# EAGLE board BatteryMonitor (EAGLE 7.6.0)
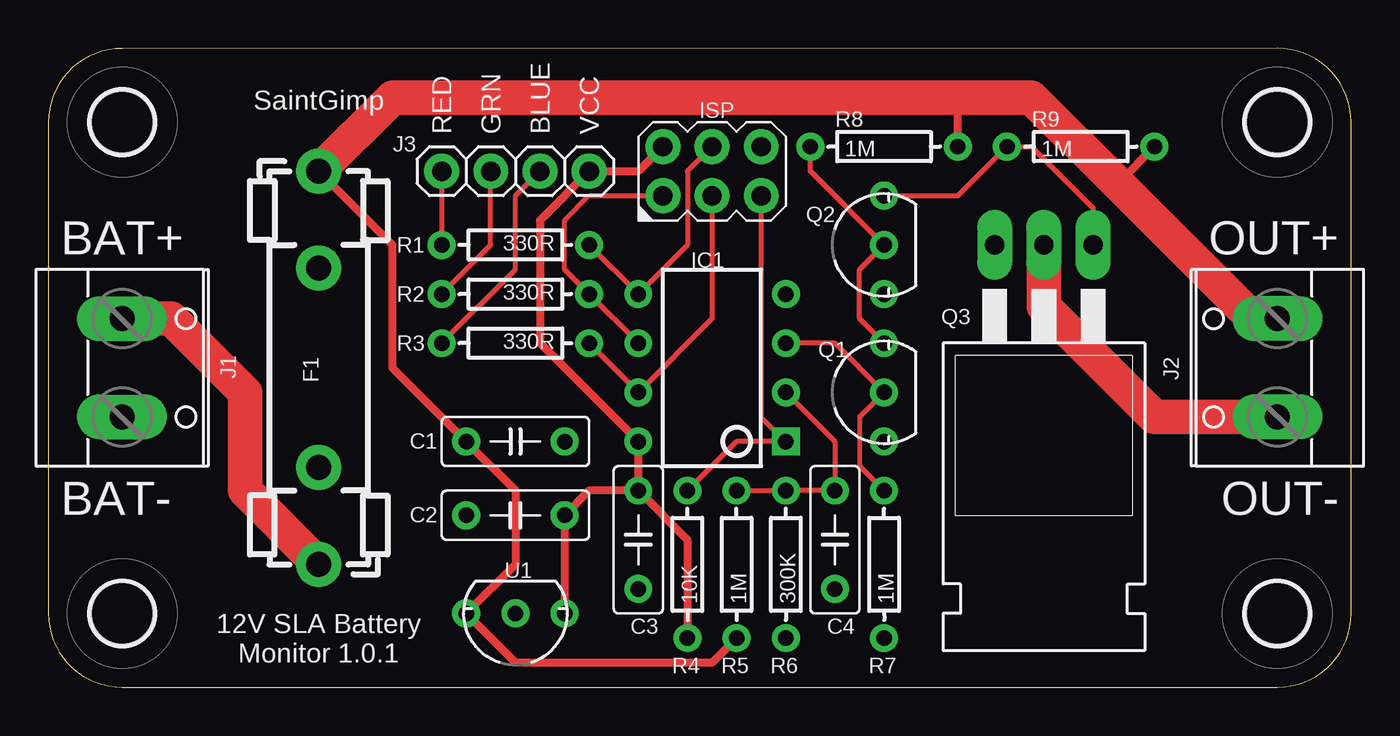
[diagram p0: board, top side]
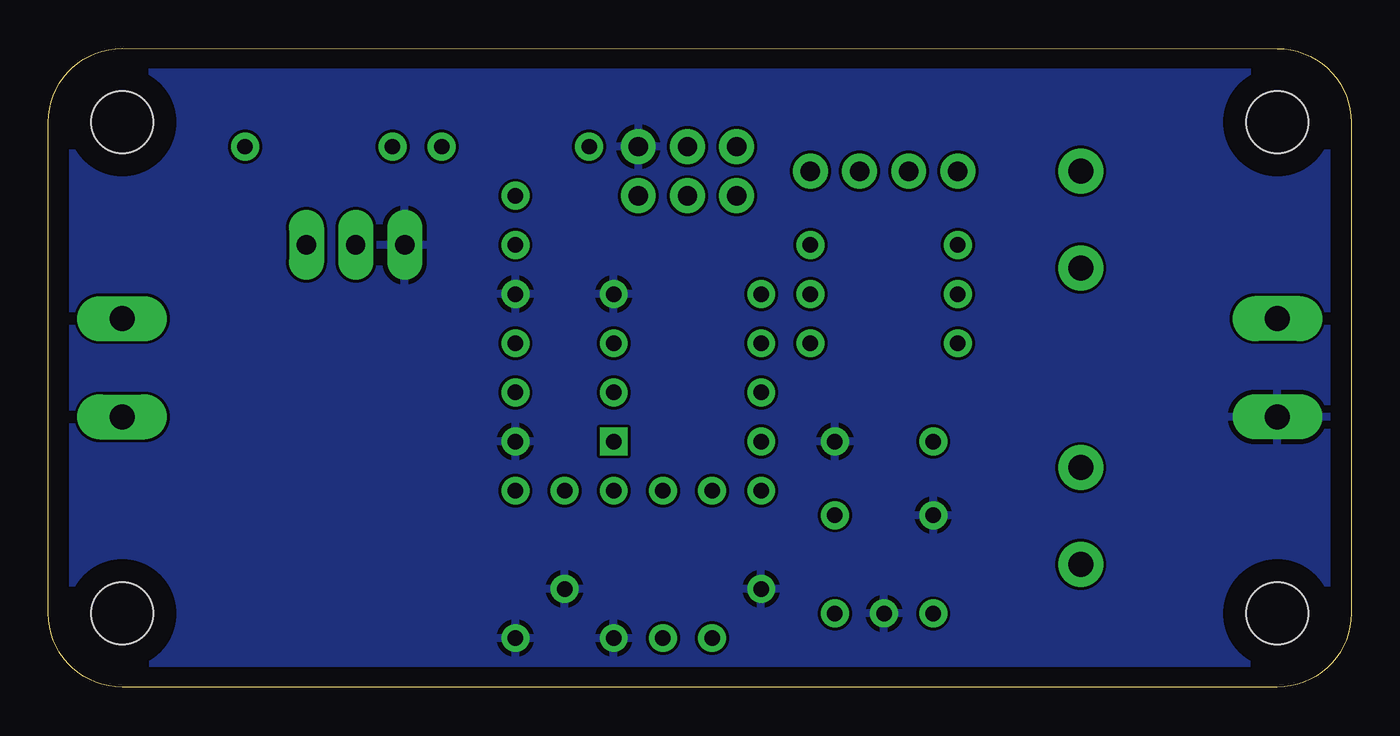
[diagram p1: board, bottom side, seen from below]

Size 67.31 x 33.02 mm. Coordinates in mm from the lower left corner, seen from the top.
Outline: 3.81,0 63.5,0 arc90 67.31,3.81 67.31,29.21 arc90 63.5,33.02 3.81,33.01 arc90 0,29.2 0,3.81 arc90 3.81,0
Copper layers (1*16): Top 0.0356mm / dielectric 1.5011mm / Bottom 0.0356mm
Design rules "Saintgimp-OSHPark": minimum track width 10mil, minimum drill 13mil, track to track 6mil, track to pad 6mil, pad to pad 6mil, via to via 6mil, smd to smd 6mil, copper to edge 15mil, drill to drill 6mil, minimum pad ring 12mil, minimum via ring 7mil, stop-mask expansion 2mil, vias tented up to drill 24mil, thermal gap 10mil

## Footprints (pad centres in the part's own frame; a part is rotated, then mirrored left to right if it is on the bottom)
CAPACITOR-5MM = drill 0.8: 1 -2.54,0; 2 2.54,0
FUSE_HOLDER_5X20MM = drill 1.3: 1 -10.16,0; 2 10.16,0; 3 -5.156,0; 5 5.156,0
DIP08 = drill 0.8 square: 1 -3.81,-3.81 | drill 0.8: 2 -1.27,-3.81; 3 1.27,-3.81; 4 3.81,-3.81; 5 3.81,3.81; 6 1.27,3.81; 7 -1.27,3.81; 8 -3.81,3.81
ICSP-HEADER = drill 1: 1 -1.27,2.54; 2 1.27,2.54; 3 -1.27,0; 4 1.27,0; 5 -1.27,-2.54; 6 1.27,-2.54
SCREW-TERM-2 = drill 1.3 long: 1 -2.54,0; 2 2.54,0
1X04 = drill 1: 1 -3.81,0; 2 -1.27,0; 3 1.27,0; 4 3.81,0
TO92-INLINE = drill 0.8: 1 -2.54,0; 2 0,0; 3 2.54,0
TO220BH-NO-HOLE = drill 1 long: P1 -2.54,-6.35; P2 0,-6.35; P3 2.54,-6.35
AXIAL-7.5MM = drill 0.8: P$1 -3.81,0; P$2 3.81,0
MOUNTING-HOLE-3.2MM = hole 3.2: 0,0

## Placement (x,y rotation side)
C1  1uF  [CAPACITOR-5MM]  24.13,12.7 0 top
C2  1uF  [CAPACITOR-5MM]  24.13,8.89 180 top
C3  1uF  [CAPACITOR-5MM]  30.48,7.62 270 top
C4  33nF  [CAPACITOR-5MM]  40.64,7.62 270 top
F1  4A  [FUSE_HOLDER_5X20MM]  13.97,16.51 90 top
IC1  ATTINY85-20PU  [DIP08]  34.29,16.51 90 top
ISP  ICSP-HEADER-6  [ICSP-HEADER]  34.29,26.67 90 top
J1  SCREW-TERM-2  [SCREW-TERM-2]  3.81,16.51 270 top
J2  SCREW-TERM-2  [SCREW-TERM-2]  63.5,16.51 90 top
J3  PINHD-1X4  [1X04]  24.13,26.67 0 top
Q1  2N7000G  [TO92-INLINE]  43.18,15.24 90 top
Q2  2N7000G  [TO92-INLINE]  43.18,22.86 90 top
Q3  IRLB8721PBF-H-NH  [TO220BH-NO-HOLE]  51.44,16.51 180 top
R1  330R  [AXIAL-7.5MM]  24.13,22.86 180 top
R2  330R  [AXIAL-7.5MM]  24.13,20.32 180 top
R3  330R  [AXIAL-7.5MM]  24.13,17.78 180 top
R4  10K  [AXIAL-7.5MM]  33.02,6.35 90 top
R5  1M  [AXIAL-7.5MM]  35.56,6.35 270 top
R6  300K  [AXIAL-7.5MM]  38.1,6.35 90 top
R7  1M  [AXIAL-7.5MM]  43.18,6.35 90 top
R8  1M  [AXIAL-7.5MM]  43.18,27.94 0 top
R9  1M  [AXIAL-7.5MM]  53.34,27.94 0 top
U1  LP2950  [TO92-INLINE]  24.13,3.81 180 top
U$1  [MOUNTING-HOLE-3.2MM]  3.81,3.81 90 top
U$2  [MOUNTING-HOLE-3.2MM]  3.81,29.21 0 top
U$3  [MOUNTING-HOLE-3.2MM]  63.5,29.21 0 top
U$4  [MOUNTING-HOLE-3.2MM]  63.5,3.81 0 top

## Library data of the parts
C1-C4 F1 IC1 ISP J1-J3 Q1-Q3 R1-R9 U1 U$1-U$4 = SaintGimp

## Nets
BAT: C1.1 F1.2 J2.2 R5.P$2 R8.P$2 R9.P$2 U1.3
BLUE: IC1.7 ISP.3 R3.P$1
GND: C1.2 C2.2 C3.2 C4.2 IC1.4 ISP.6 J1.2 Q1.1 Q2.1 Q3.P3 R6.P$1 R7.P$1 U1.2
GRN: IC1.6 ISP.1 R2.P$1
N$1: F1.1 J1.1
N$3: IC1.3 Q1.2 R7.P$2
N$4: J2.1 Q3.P2
N$5: C4.1 IC1.2 R5.P$1 R6.P$2
N$6: Q1.3 Q2.2 R8.P$1
N$7: Q2.3 Q3.P1 R9.P$1
N$8: J3.1 R1.P$2
N$9: J3.2 R2.P$2
N$10: J3.3 R3.P$2
RED: IC1.5 ISP.4 R1.P$1
RESET: IC1.1 ISP.5 R4.P$2
VCC: C2.1 C3.1 IC1.8 ISP.2 J3.4 R4.P$1 U1.1

## Tracks (layer width: path | path; a pad name or v marks a point on that pad's centre or on a via)
BAT
  Top 0.406: F1.2 17.78,22.86 17.78,16.51 C1.1 24.13,10.16 24.13,6.35 U1.3 24.13,1.27 34.29,1.27 R5.P$2 | R8.P$2 46.99,30.48 | R9.P$2 55.24,26.04
  Top 1.778: J2.2 62.23,19.05 55.24,26.04 50.8,30.48 46.99,30.48 17.78,30.48 F1.2
BLUE
  Top 0.254: ISP.3 34.29,19.05 IC1.7 R3.P$1
GND
  pour Bottom: 1.27,31.75 66.04,31.75 66.04,1.27 1.27,1.27
GRN
  Top 0.254: ISP.1 27.94,25.4 26.67,24.13 26.67,21.59 R2.P$1 IC1.6
N$1
  Top 1.778: J1.1 6.35,19.05 10.16,15.24 10.16,10.16 F1.1
N$3
  Top 0.254: R7.P$2 41.91,11.43 41.91,13.97 Q1.2 40.64,17.78 IC1.3
N$4
  Top 1.778: J2.1 57.15,13.97 51.44,19.68 Q3.P2
N$5
  Top 0.254: R5.P$1 R6.P$2 C4.1 40.64,12.7 IC1.2
N$6
  Top 0.254: Q1.3 41.91,19.05 41.91,21.59 Q2.2 39.37,26.67 R8.P$1
N$7
  Top 0.254: Q2.3 46.99,25.4 R9.P$1 50.8,27.94 53.98,24.77 Q3.P1
N$8
  Top 0.254: J3.1 R1.P$2
N$9
  Top 0.254: R2.P$2 22.86,22.86 J3.2
N$10
  Top 0.254: R3.P$2 24.13,21.59 24.13,25.4 J3.3
RED
  Top 0.254: ISP.4 33.02,26.67 33.02,22.86 IC1.5 R1.P$1
RESET
  Top 0.254: ISP.5 36.83,13.97 IC1.1 35.56,12.7 R4.P$2
VCC
  Top 0.406: C3.1 IC1.8 25.4,17.78 25.4,24.13 J3.4 30.48,26.67 ISP.2 | R4.P$1 33.02,7.62 C3.1 | C3.1 27.94,10.16 C2.1 U1.1

## Text on the board
_tsilk: SaintGimp | RED | GRN | BLUE | VCC | BAT+ | OUT+ | BAT- | OUT- | 12V SLA Battery / Monitor 1.0.1